# Altium PCB NodeCardWithCanThick.PcbDoc
Units mm, origin at the board's own origin, x right, y up, seen from the top; angles counter-clockwise.
Board outline 199.06 x 48.59 mm, 8 copper layers (Top Layer, Internal Plane 1, Internal Plane 2, Internal Plane 3, Internal Plane 4, Internal Plane 5, Internal Plane 6, Bottom Layer), stack 0.605 mm thick; 93 components, 51 nets, 319 pads, 49 vias.
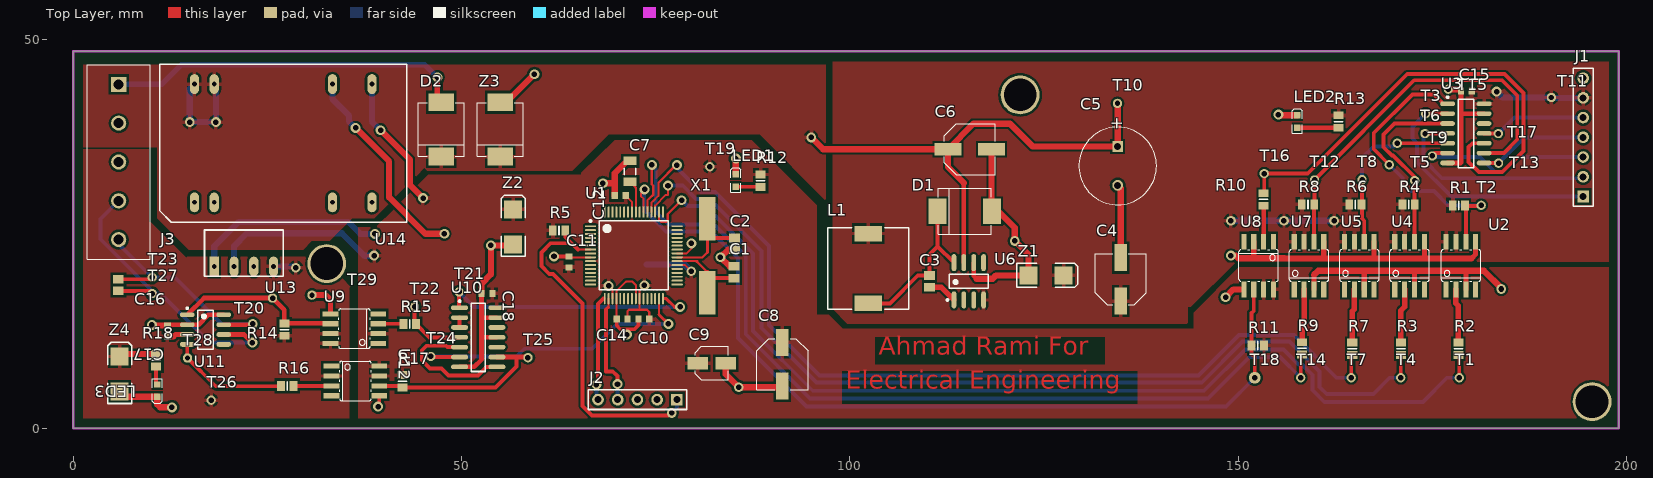
[diagram p0: Top Layer view]
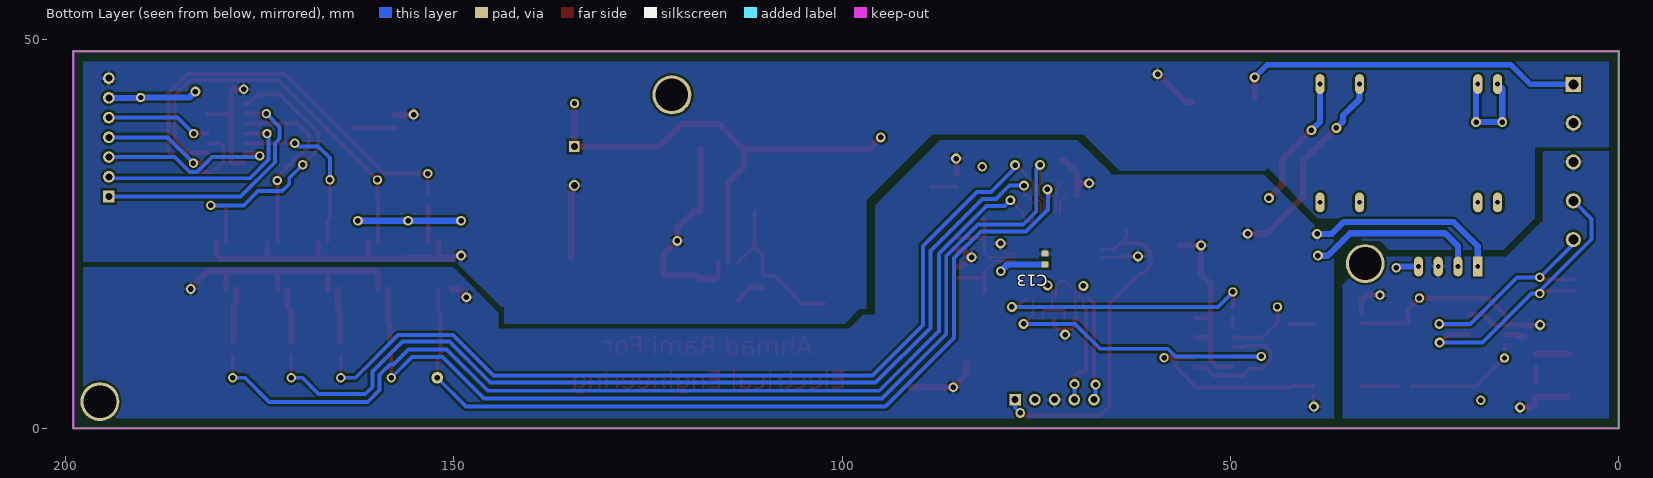
[diagram p1: Bottom Layer view, seen from below]
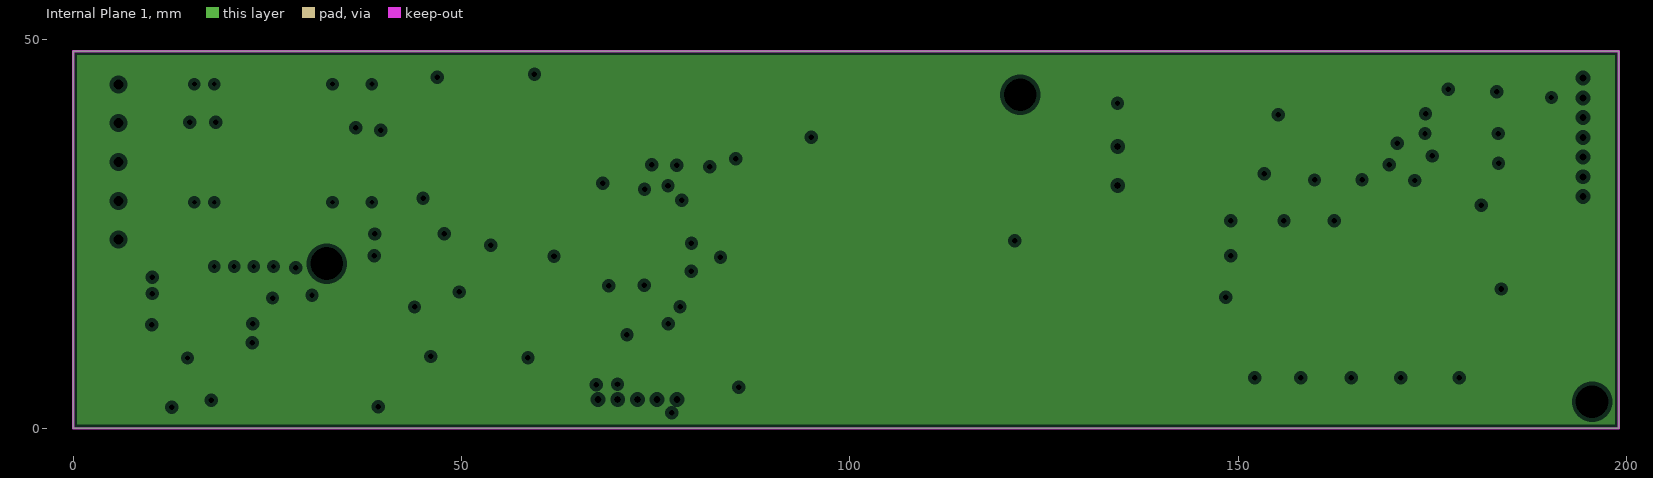
[diagram p2: Internal Plane 1, clearances drawn from the general rule]
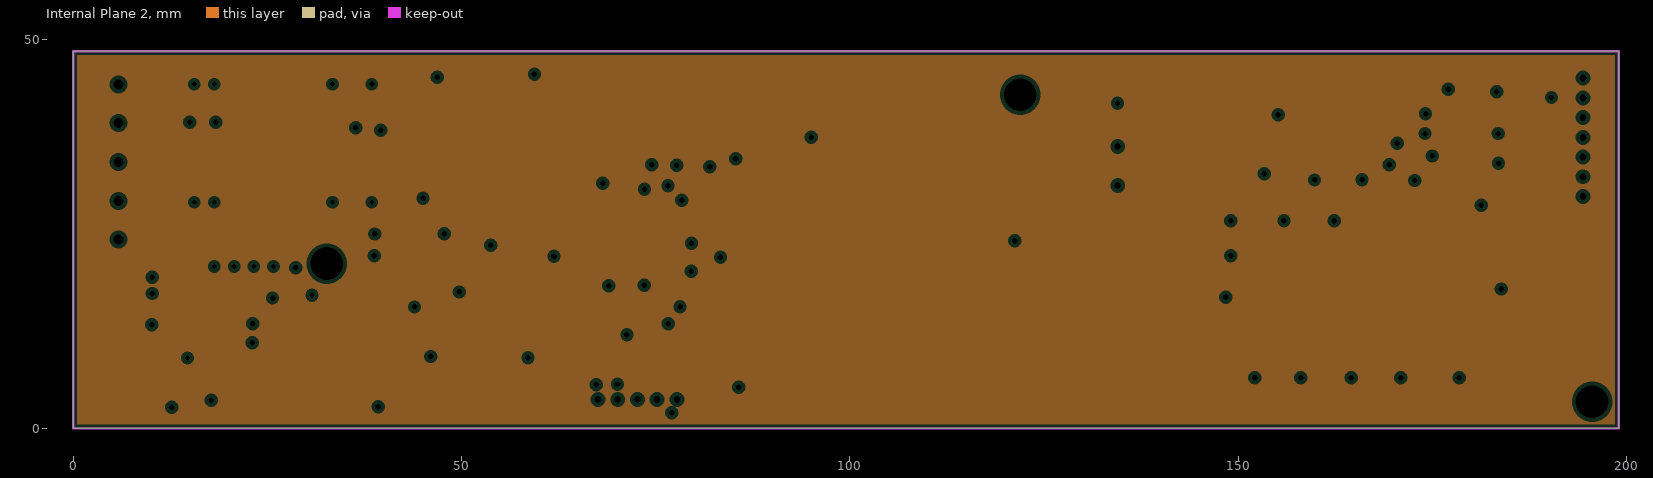
[diagram p3: Internal Plane 2, clearances drawn from the general rule]
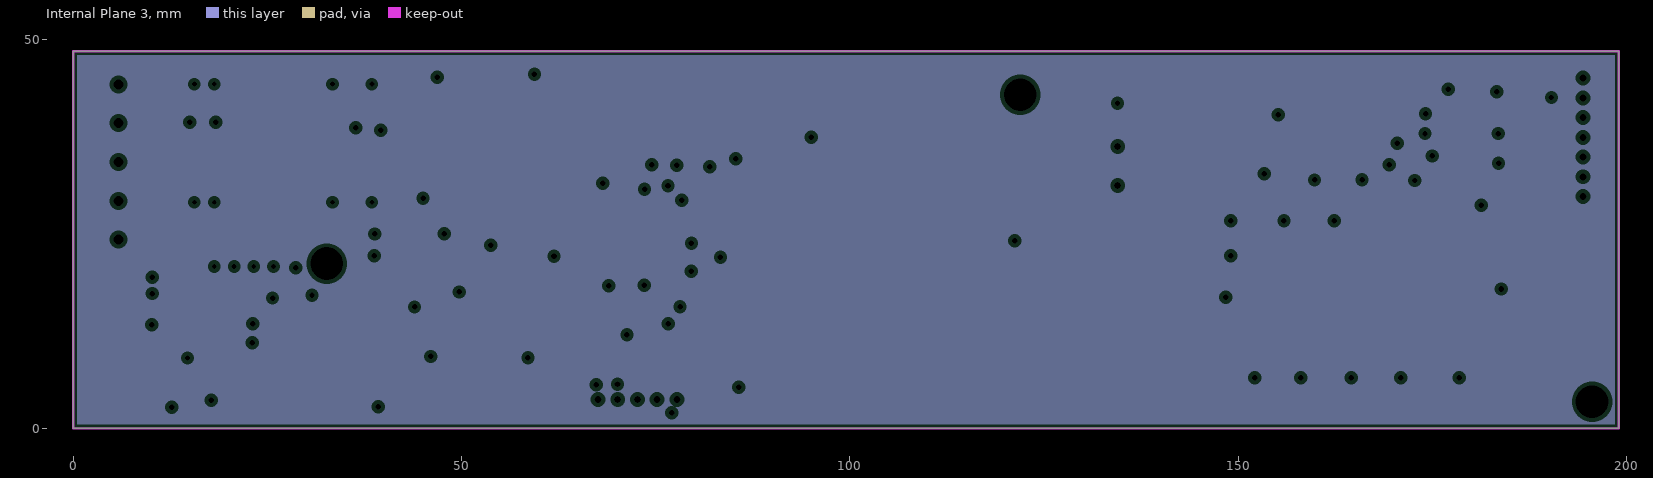
[diagram p4: Internal Plane 3, clearances drawn from the general rule]
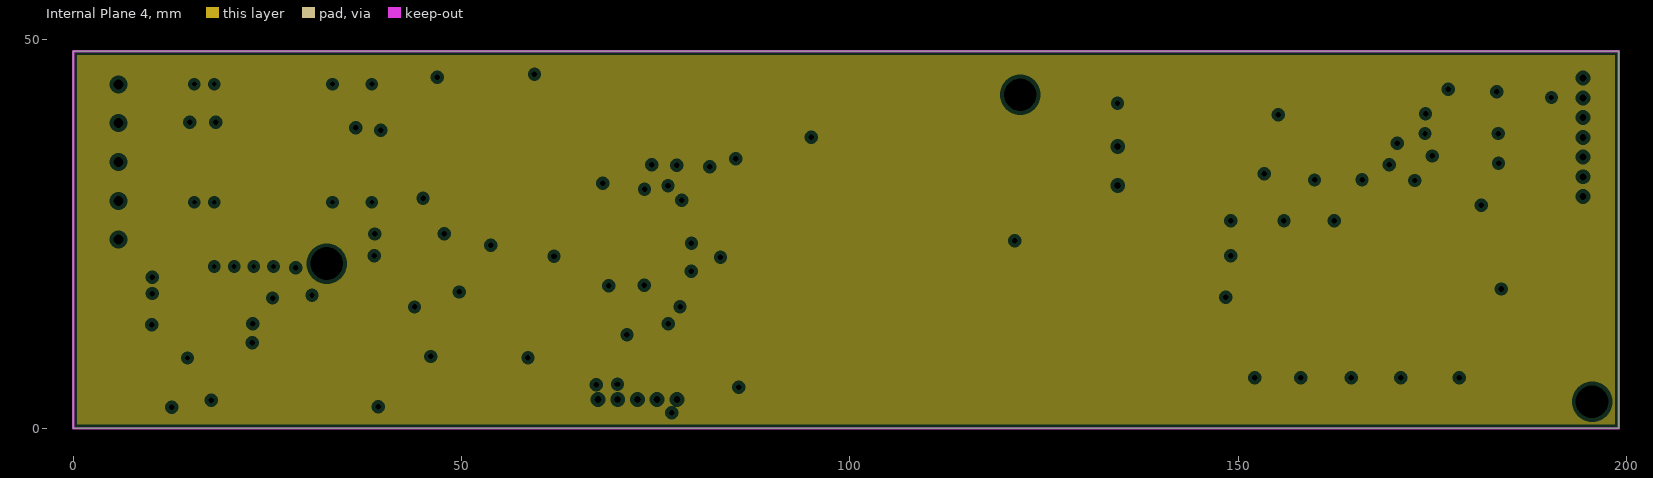
[diagram p5: Internal Plane 4, clearances drawn from the general rule]
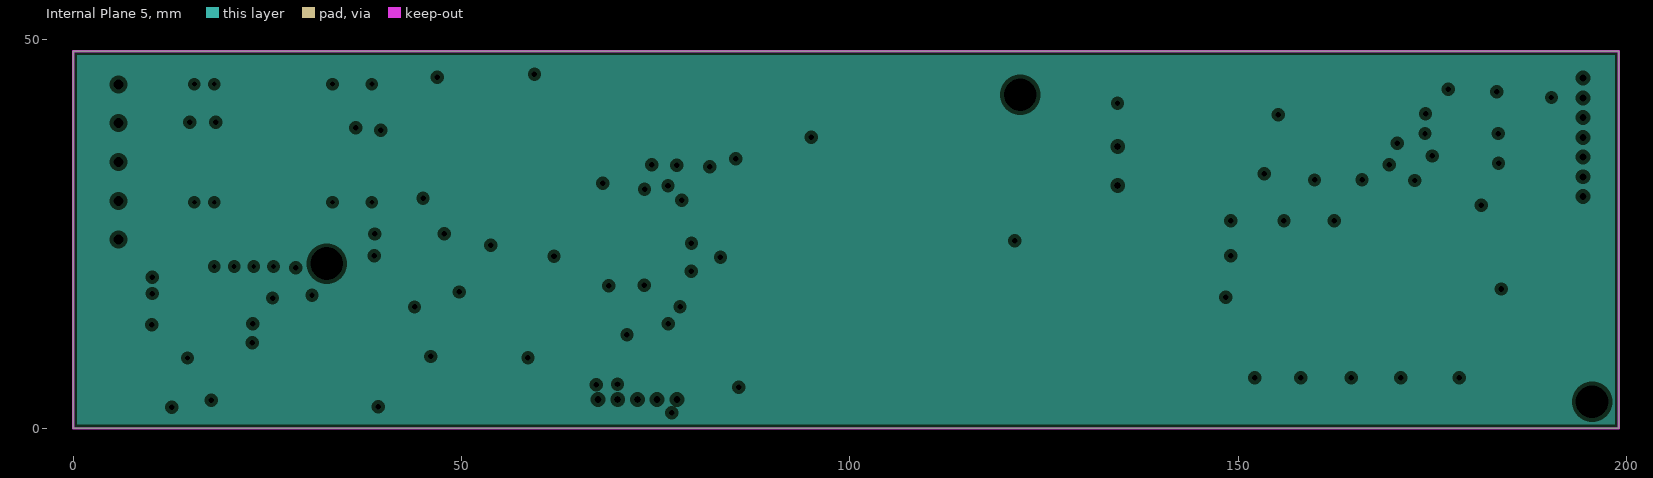
[diagram p6: Internal Plane 5, clearances drawn from the general rule]
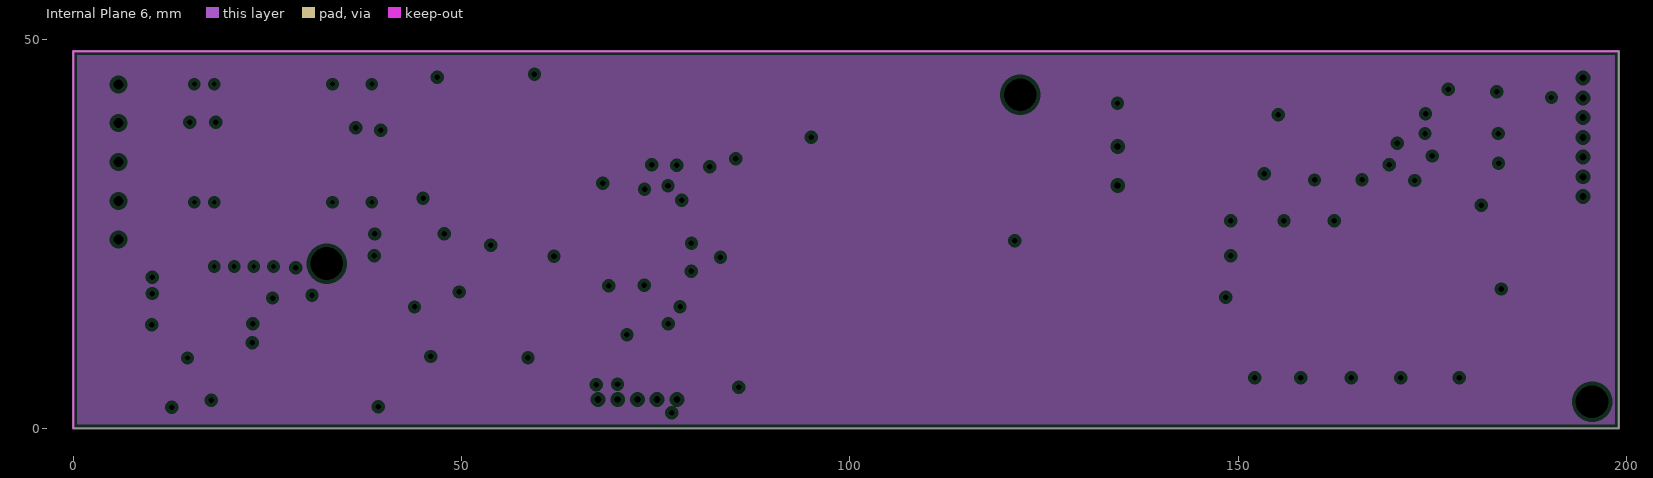
[diagram p7: Internal Plane 6, clearances drawn from the general rule]

## Layer stack, top to bottom
Top Solder: solder mask 0.0102, Solder Resist, Dk 3.5
Top Layer: signal copper 0.0356
Internal Plane 1: plane copper 0.0356
Internal Plane 2: plane copper 0.0356
Internal Plane 3: plane copper 0.0356
Internal Plane 4: plane copper 0.0356
Internal Plane 5: plane copper 0.0356
Internal Plane 6: plane copper 0.0356
Dielectric 1: dielectric 0.32, FR-4, Dk 4.8
Bottom Layer: signal copper 0.0356
Bottom Solder: solder mask 0.0102, Solder Resist, Dk 3.5

## Board outline
-0.025,-0.025 -0.025,48.565 199.034,48.565 199.034,-0.025

## Design rules (kind name [scope] priority, off if disabled: settings)
Clearance [All] p1: gap=0.3
HoleSize [All] p1: absolutevalues=TRUE maxlimit=4.5 minlimit=0.025 maxpercent=80.000 minpercent=20.000
PasteMaskExpansion [All] p1: expansion=0.5
PlaneClearance [All] p1: clearance=0.508
PlaneConnect [All] p1: planeconnectstyle=Relief reliefexpansion=0.508 reliefentries=4 reliefconductorwidth=0.5 reliefairgap=0.254
PolygonConnect [All] p1: connectstyle=Relief reliefconductorwidth=0.5 reliefentries=4 polygonreliefangle="90 Angle" airgapwidth=0.3
RoomDefinition NodeCardWithCan [InComponentClass('NodeCardWithCan')] p1: confinementstyle=ConfineIn formatcopy=TRUE lockcomponents=FALSE outline -50.8,-76.2 0,-76.2 0,-50.8 -50.8,-50.8
RoutingVias [All] p1: holewidth=0.7 width=1.1 viastyle="Through Hole" minholewidth=0.7 minwidth=1.1 maxholewidth=0.9 maxwidth=1.3
SolderMaskExpansion [All] p1: expansion=0.127
Width Power_Width [(InNet('CTRLGND') OR InNet('CTRLVCC+3.3') OR InNet('INPUTGND') OR InNet('INPUTVCC') OR InNet('MAINGND') OR InNet('MAINPOWER+24') OR InNet('OUTVCC+5'))] p1: maxlimit=1 minlimit=0.8 preferedwidth=0.8 minimp=50.000000 maximp=50.000000 favimp=50.000000
Width [All] p2: maxlimit=0.7 minlimit=0.5 preferedwidth=0.5 minimp=50.000000 maximp=50.000000 favimp=50.000000
26 further rules are at their usual default settings.

## Components (designator, comment, footprint, x,y, rotation, side; value= is the part's Value field where it differs from the comment)
C1 "Cap" C0805 85.09,20.091 r270 top
C2 "Cap" C0805 85.141,23.749 r90 top
C3 "Cap" C0805 110.236,18.923 r90 top
C4 "100uF" "WCAP-PSLP 6.3x5.8x2.2" 134.874,19.177 r90 top
C5 "220uF" "WCAP-PTG5 10x12.5x5x0.6" 134.493,33.782 r270 top
C6 "22 μF" "WCAP-PSLP 6.3x5.8x2.2" 115.443,35.941 r0 top
C7 "Cap" C1206 71.704,33.071 r270 top
C8 "100uF" "WCAP-PSLP 6.3x5.8x2.2" 91.313,8.255 r270 top
C9 "22uF" "WCAP-PSLP 4x5.5x1" 82.22,8.382 r0 top
C10 "Cap" 1608[0603] 73.47,14.05 r0 top
C11 "Cap" 1608[0603] 63.818,21.416 r270 top
C12 "Cap" 1608[0603] 70.434,29.947 r0 top
C13 "Cap" 1608[0603] 73.851,21.79 r270 bottom
C14 "Cap" 1608[0603] 70.676,14.05 r0 top
C15 "Cap" 1608[0603] 179.4,43.434 r0 top
C16 "Cap" C0805 5.791,18.44 r90 top
C17 "Cap" 1608[0603] 12.116,12.548 r270 top
C18 "Cap" 1608[0603] 53.264,17.374 r0 top
D1 "Diode" DO-214AB_Unidirectional 114.808,27.94 r0 top
D2 "Diode" DO-214AB_Unidirectional 47.371,38.481 r90 top
J1 "Header 7" HDR1X7 194.437,29.845 r90 top
J2 "Header 5" HDR1X5 77.724,3.683 r180 top
J3 "691241710005" 691241710005 5.842,34.29 r270 top
L1 "68uH" "WE-PD 1030" 102.362,20.574 r90 top
LED1 "150060GS75000" LED_0603_Green 85.319,31.902 r90 top
LED2 "150060GS75000" LED_0603_Green 157.607,39.497 r90 top
LED3 "150060GS75000" LED_0603_Green 10.795,4.851 r270 top
R1 "Res1" 6-0805_L 178.435,28.702 r180 top
R2 "Res1" 6-0805_L 178.359,10.249 r90 top
R3 "Res1" 6-0805_L 170.967,10.249 r90 top
R4 "Res1" 6-0805_L 171.958,28.829 r180 top
R5 "Res1" 6-0805_L 62.548,25.48 r180 top
R6 "Res1" 6-0805_L 165.1,28.829 r180 top
R7 "Res1" 6-0805_L 164.694,10.249 r90 top
R8 "Res1" 6-0805_L 159.004,28.829 r180 top
R9 "Res1" 6-0805_L 158.242,10.287 r90 top
R10 "Res1" 6-0805_L 153.289,29.464 r90 top
R11 "Res1" 6-0805_L 152.527,10.668 r180 top
R12 "Res1" 6-0805_L 88.519,31.877 r90 top
R13 "Res1" 6-0805_L 162.941,39.497 r90 top
R14 "Res1" 6-0805_L 27.178,12.7 r270 top
R15 "Res1" 6-0805_L 43.332,13.411 r180 top
R16 "Res1" 6-0805_L 27.559,5.461 r180 top
R17 "Res1" 6-0805_L 42.367,6.045 r270 top
R18 "Res1" 6-0805_L 10.668,8.763 r90 top
T1 "TestPoint" "Test Point"#1 1440.993,1269.771 r0 top
T2 "TestPoint" "Test Point"#1 1443.812,1291.971 r0 top
T3 "TestPoint" "Test Point"#1 1436.649,1303.782 r0 top
T4 "TestPoint" "Test Point"#1 1433.449,1269.771 r0 top
T5 "TestPoint" "Test Point"#1 1435.252,1295.171 r0 top
T6 "TestPoint" "Test Point"#1 1436.573,1301.217 r0 top
T7 "TestPoint" "Test Point"#1 1427.074,1269.771 r0 top
T8 "TestPoint" "Test Point"#1 1428.471,1295.273 r0 top
T9 "TestPoint" "Test Point"#1 1437.51,1298.334 r0 top
T10 "TestPoint" "Test Point"#1 -1128.801,1304.341 r90 top
T11 "TestPoint" "Test Point"#1 1452.855,1305.865 r0 top
T12 "TestPoint" "Test Point"#1 -1103.427,1294.486 r90 top
T13 "TestPoint" "Test Point"#1 -1079.729,1296.645 r90 top
T14 "TestPoint" "Test Point"#1 -1105.205,1269.009 r90 top
T15 "TestPoint" "Test Point"#1 -1086.206,1306.17 r90 top
T16 "TestPoint" "Test Point"#1 -1109.904,1295.298 r90 top
T17 "TestPoint" "Test Point"#1 -1079.754,1300.455 r90 top
T18 "TestPoint" "Test Point"#2 152.146,6.502 r90 top
T19 "TestPoint" "Test Point"#1 -1181.303,1296.187 r90 top
T20 "TestPoint" "Test Point"#1 -1237.615,1279.271 r90 top
T21 "TestPoint" "Test Point"#1 1312.189,1280.82 r0 top
T22 "TestPoint" "Test Point"#1 -1219.327,1278.128 r90 top
T23 "TestPoint" "Test Point"#1 -1253.109,1281.938 r90 top
T24 "TestPoint" "Test Point"#1 -1217.244,1271.753 r90 top
T25 "TestPoint" "Test Point"#1 -1204.722,1271.6 r90 top
T26 "TestPoint" "Test Point"#1 -1245.514,1266.114 r90 top
T27 "TestPoint" "Test Point"#1 -1253.109,1279.855 r90 top
T28 "TestPoint" "Test Point"#1 -1248.562,1271.549 r90 top
T29 "TestPoint" "Test Point"#1 -1232.535,1279.652 r90 top
U1 "DSPIC33EP512MC806-I/PT" MCHP-TQFP-PT64_N 72.183,22.263 r0 top
U2 "HCPL0601" SOIC08 178.689,20.955 r0 top
U3 "SN74HC14D" D014_L 179.324,37.973 r0 top
U4 "HCPL0601" SOIC08 172.085,20.955 r0 top
U5 "HCPL0601" SOIC08 165.608,20.955 r0 top
U6 "LM2675M-5.0/NOPB" M08A_N 115.316,18.923 r90 top
U7 "HCPL0601" SOIC08 159.131,20.955 r0 top
U8 "HCPL0601" SOIC08 152.654,20.955 r180 top
U9 "HCPL0601" SOIC08 36.195,12.827 r90 top
U10 "SN74HC14D" D014_N 52.146,11.709 r0 top
U11 "SN65HVD1050D" D8_L 17.018,12.7 r0 top
U12 "HCPL0601" SOIC08 36.322,6.096 r270 top
U13 "NKE0305SC" NKE0305SC 18.161,20.828 r90 top
U14 "TEN 3-2410N" "TRACO ISOLATED CONVERTER" 13.056,29.083 r90 top
X1 "ABLS2-8.000MHZ-D4Y-T" XTAL1140X470X330 81.649,22.204 r270 top
Z1 "Zener" SMB 125.273,19.685 r0 top
Z2 "Zener" SMB 56.642,25.933 r90 top
Z3 "36V zener" DO-214AB_Unidirectional 54.991,38.481 r90 top
Z4 "Zener" SMB 5.969,6.985 r90 top

## Footprints (in the part's own frame and the unit in brackets; to place one, negate y for a bottom-side part, rotate by r counter-clockwise, add the part's x,y. Pads: shape width x height; smd on the part's side, far side on the other; paste and mask are expansions set on the pad)
6-0805_L [mm] "Chip Resistor, Body 2.0x1.2mm, IPC High Density"
  rect 1x1.3 smd: 1(-0.8,0) 2(0.8,0)
  silkscreen extent 0,-0.55 0,0.55, body extent -1.07,-0.7 1.07,0.7, height 0.7
1608[0603] [mm] "Chip Capacitor, Body 1.6x0.8mm, IPC High Density"
  rect 0.8x0.9 smd: 1(-0.7,0) 2(0.7,0)
  body extent -0.87,-0.48 0.87,0.48, height 1.3
691241710005 [mm] "Serie 2417 - 5.00 mm _ 5 pins"
  rect 1.95x1.95 hole 1.3: 1(-10,0)
  round 1.95 hole 1.3: 2(-5,0) 3(0,0) 4(5,0) 5(10,0)
  silkscreen extent -12.5,-4.05 12.5,4.05, body extent -12.5,-4.05 12.5,4.05, height 10.1
C0805 [mm] "Chip Capacitor, Body 2.0x1.3mm, IPC High Density"
  rect 1.1x1.4 smd: 1(-0.75,0) 2(0.75,0)
  body extent -1.1,-0.72 1.1,0.72, height 1.4
C1206 [mm] "Chip Capacitor, Body 3.2x1.6mm, IPC High Density"
  rect 1.1x1.7 smd: 1(-1.35,0) 2(1.35,0)
  silkscreen extent -0.4,-0.75 0.4,0.75, body extent -1.7,-0.9 1.7,0.9, height 1.3
D8_L [mm] "SOIC, 8-Leads, Body 4.9x3.9mm, Pitch 1.27mm, IPC High Density"
  oval 1.9x0.6 smd: 1(-2.35,1.905) 2(-2.35,0.635) 3(-2.35,-0.635) 4(-2.35,-1.905) 5(2.35,-1.905) 6(2.35,-0.635) 7(2.35,0.635) 8(2.35,1.905)
  silkscreen extent -2.47,-2.5 1,2.88, body extent -2,-2.5 2,2.5, height 1.75
D014_L [mm] "SOIC, 14-Leads, Body 8.7x3.9mm, Pitch 1.27mm, IPC High Density"
  oval 1.9x0.6 smd: 1(-2.35,3.81) 2(-2.35,2.54) 3(-2.35,1.27) 4(-2.35,0) 5(-2.35,-1.27) 6(-2.35,-2.54) 7(-2.35,-3.81) 8(2.35,-3.81) 9(2.35,-2.54) 10(2.35,-1.27) 11(2.35,0) 12(2.35,1.27) 13(2.35,2.54) 14(2.35,3.81)
  silkscreen extent -2.47,-4.4 1,4.78, body extent -1.95,-4.33 1.95,4.33, height 1.75
D014_N [mm] "SOIC, 14-Leads, Body 8.7x3.9mm, Pitch 1.27mm, IPC Medium Density"
  oval 2.2x0.6 smd: 1(-2.4,3.81) 2(-2.4,2.54) 3(-2.4,1.27) 4(-2.4,0) 5(-2.4,-1.27) 6(-2.4,-2.54) 7(-2.4,-3.81) 8(2.4,-3.81) 9(2.4,-2.54) 10(2.4,-1.27) 11(2.4,0) 12(2.4,1.27) 13(2.4,2.54) 14(2.4,3.81)
  silkscreen extent -2.52,-4.4 0.9,4.78, body extent -1.95,-4.33 1.95,4.33, height 1.75
DO-214AB_Unidirectional [mm] "WE-TVSP Power TVS Diode, DO-214AB, Unidirectional"
  rect 2.3x3.3 smd: 1(-3.5,0) 2(3.5,0)
  silkscreen extent -3.43,-2.95 3.43,2.95, body extent -3.97,-2.95 3.97,2.95, height 2.5
HDR1X5 [mm] "Connector; Header; 5 Position"
  rect 1.5x1.5 hole 0.9: 1(0,0)
  round 1.5 hole 0.9: 2(2.54,0) 3(5.08,0) 4(7.62,0) 5(10.16,0)
  silkscreen extent -1.27,-1.27 11.43,1.27
HDR1X7 [mm] "Connector; Header; 7 Position"
  rect 1.5x1.5 hole 0.9: 1(0,0)
  round 1.5 hole 0.9: 2(2.54,0) 3(5.08,0) 4(7.62,0) 5(10.16,0) 6(12.7,0) 7(15.24,0)
  silkscreen extent -1.27,-1.27 16.51,1.27
LED_0603_Green [mm] "Chip LED, 2-Leads, Body 1.6x0.8mm, IPC Medium Density"
  rect 0.8x0.8 smd: 1(-0.8,0) 2(0.8,0)
  silkscreen extent -1.52,-0.64 1.65,0.64, body extent -0.8,-0.4 0.8,0.4, height 0.7
M08A_N [mm] "SOIC, 8-Leads, Body 4.9x3.9mm, Pitch 1.27mm, IPC Medium Density"
  oval 2.2x0.6 smd: 1(-2.4,1.905) 2(-2.4,0.635) 3(-2.4,-0.635) 4(-2.4,-1.905) 5(2.4,-1.905) 6(2.4,-0.635) 7(2.4,0.635) 8(2.4,1.905)
  silkscreen extent -2.52,-2.5 0.9,2.88, body extent -2,-2.5 2,2.5, height 1.75
MCHP-TQFP-PT64_N [mm] "TQFP, 64-Leads, Body 10x10mm, Pitch 0.5mm, IPC Medium Density"
  oval 1.45x0.25 smd: 1(-5.575,3.75) 2(-5.575,3.25) 3(-5.575,2.75) 4(-5.575,2.25) 5(-5.575,1.75) 6(-5.575,1.25) 7(-5.575,0.75) 8(-5.575,0.25) 9(-5.575,-0.25) 10(-5.575,-0.75) 11(-5.575,-1.25) 12(-5.575,-1.75) 13(-5.575,-2.25) 14(-5.575,-2.75) 15(-5.575,-3.25) 16(-5.575,-3.75) 33(5.575,-3.75) 34(5.575,-3.25) 35(5.575,-2.75) 36(5.575,-2.25) 37(5.575,-1.75) 38(5.575,-1.25) 39(5.575,-0.75) 40(5.575,-0.25) 41(5.575,0.25) 42(5.575,0.75) 43(5.575,1.25) 44(5.575,1.75) 45(5.575,2.25) 46(5.575,2.75) 47(5.575,3.25) 48(5.575,3.75)
  oval 0.25x1.45 smd: 17(-3.75,-5.575) 18(-3.25,-5.575) 19(-2.75,-5.575) 20(-2.25,-5.575) 21(-1.75,-5.575) 22(-1.25,-5.575) 23(-0.75,-5.575) 24(-0.25,-5.575) 25(0.25,-5.575) 26(0.75,-5.575) 27(1.25,-5.575) 28(1.75,-5.575) 29(2.25,-5.575) 30(2.75,-5.575) 31(3.25,-5.575) 32(3.75,-5.575) 49(3.75,5.575) 50(3.25,5.575) 51(2.75,5.575) 52(2.25,5.575) 53(1.75,5.575) 54(1.25,5.575) 55(0.75,5.575) 56(0.25,5.575) 57(-0.25,5.575) 58(-0.75,5.575) 59(-1.25,5.575) 60(-1.75,5.575) 61(-2.25,5.575) 62(-2.75,5.575) 63(-3.25,5.575) 64(-3.75,5.575)
  silkscreen extent -5.7,-4.45 4.45,4.55, body extent -5,-5 5,5, height 1.2
NKE0305SC [mm]
  rect 2.54x1.2 hole 0.6: 1(0,0)
  oval 2.54x1.2 hole 0.6: 2(0,-2.54) 3(0,-5.08) 4(0,-7.62)
  silkscreen extent -1.27,-8.89 4.7,1.27
SMB [mm] "DO-214-AA/SMB; 2 C-Bend Leads; Body 5.3 x 3.6 mm, inc. leads (LxW)"
  rect 2.3x2.3 smd: 1(-2.25,0) 2(2.25,0)
  silkscreen extent -3.8,-1.55 4.1,1.55
SOIC08 [mil]
  rect 26x80 smd paste-1000 mask-1000: 1(-75,-121) 2(-25,-121) 3(25,-121) 4(75,-121) 5(75,121) 6(25,121) 7(-25,121) 8(-75,121)
  silkscreen extent -100,-80 100,80
"Test Point"#1 [mm] "Test Point"
  round 1.2 hole 0.7: 1(-1262.507,-1263.269)
"Test Point"#2 [mm] "Test Point"
  round 1.5 hole 0.7: 1(0,0)
"TRACO ISOLATED CONVERTER" [mm]
  oval 2.54x1.2 hole 0.6: 2(0,-2.54) 3(0,-5.08) 9(0,-20.32) 11(0,-25.4) 14(15.24,-25.4) 16(15.24,-20.32) 22(15.24,-5.08) 23(15.24,-2.54)
  silkscreen extent -2.54,-29.9 17.78,1.95
"WCAP-PSLP 4x5.5x1" [mm] "Polarized capacitors, Aluminum Polymer Capacitors, 2-Leads, Body 4x5.5x1"
  rect 2.6x1.6 smd: 1(-1.8,0) 2(1.8,0)
  silkscreen extent -2.15,-2.15 2.15,2.15, body extent -2.5,-2.15 2.5,2.15, height 5.45
"WCAP-PSLP 6.3x5.8x2.2" [mm] "Polarized capacitors, Aluminum Polymer Capacitors, 2-Leads, Body 6.3x5.8x2.2"
  rect 3.5x1.6 smd: 1(-2.8,0) 2(2.8,0)
  silkscreen extent -3.3,-3.3 3.3,3.3, body extent -3.65,-3.3 3.65,3.3, height 5.75
"WCAP-PTG5 10x12.5x5x0.6" [mm] "Polarized capacitors, Aluminum Polymer Capacitors, 2-Leads, Body 10x12.5x5x0.6"
  rect 1.4x1.4 hole 0.9: 1(-2.5,0)
  round 1.4 hole 0.9: 2(2.5,0)
  silkscreen extent -5,-5 5,5, body extent -4.96,-4.97 4.99,5, height 12.71
"WE-PD 1030" [mm] "SMD Inductor, 2-Leads, Body 10,0x10,0mm"
  rect 2x3.5 smd: 1(-4.5,0) 2(4.5,0)
  silkscreen extent -5.25,-5.2 5.25,5.2, body extent -5,-5 5,5, height 2.7
XTAL1140X470X330 [mm]
  rect 5.6x2.1 smd paste-25.4 mask-25.4: 1(-4.752,-0.001) 2(4.748,-0.001)

## Part data
C1 C2 C3 C7 C10 C11 C12 C13 C14 C15 C16 C17 C18: "Capacitor"
C4: library part "WCAP-PSLP 6.3x5.8x2.2 875105544003", "WCAP-PSLP Aluminum Polymer Capacitors , 22 µF; + / - 20%; 16 V , 6,3 x 5,8"
C5: library part "WCAP-PTG5 10x12.5x5x0.6 870025175010", "WCAP-PTG5 Aluminum Polymer Capacitors , 1000 µF; + / - 20%; 6,3 V , 10 x 12,5"
C6: library part "WCAP-PSLP 6.3x5.8x2.2 875105544003", "WCAP-PSLP Aluminum Polymer Capacitors , 22 µF; + / - 20%; 50 V , 6,3 x 5,8"
C8: library part "WCAP-PSLP 6.3x5.8x2.2 875105544003", "WCAP-PSLP Aluminum Polymer Capacitors , 22 µF; + / - 20%; 16V , 6,3 x 5,8"
C9: library part "WCAP-PSLP 4x5.5x1 875105240001", "WCAP-PSLP Aluminum Polymer Capacitors , 10 µF; + / - 20%; 10 V , 4 x 5,5"
D1 D2: "Default Diode"
J1: "Header, 7-Pin"
J2: "Header, 5-Pin"
J3: "WR-TBL Horizontal Cable Entry With Rising Cage Clamp,Serie 2417 - 5.00 mm"
L1: library part "WE-PD 1030, 7447713015", "SMD-Shielded Power Inductor WE-PD, L=1.50 µH"
LED1 LED2 LED3: library part "WL-SMCW 0603  150060GS75000", "SMD mono-color Chip LED, WL-SMCW, Green"
R1 R2 R3 R4 R5 R6 R7 R8 R9 R10 R11 R12 R13 R14 R15 R16 R17 R18: "Resistor"
T1 T2 T3 T4 T5 T6 T7 T8 T9 T10 T11 T12 T13 T14 T15 T16 T17 T18 T19 T20 T21 T22 T23 T24 T25 T26 T27 T28 T29: library part "Test Point", "Test Point"
U1: "16-Bit Microcontroller and Digital Signal Controller with High-Speed PWM, USB and Advanced Analog, 70 MIPS, 53 I/O, EPMP, -40 to 85 degC, 64-pin TQFP (PT64), Tray"
U3 U10: "Hex Schmitt-Trigger Inverter"
U6: "SIMPLE SWITCHER® Power Converter High Efficiency 1A Step-Down Voltage Regulator, 8-pin Narrow SOIC, Pb-Free"
U11: "High-Speed EMC Optimized CAN Transceiver, 70 mA, 5 V, -40 to 125 degC, 8-pin SOIC (D), Green (RoHS & no Sb/Br)"
U13: "muRata 3.3 to 5.0 isolated converter"
U14: "Traco 24/3.3 isolated converter"
Z1 Z2 Z3 Z4: library part "WE-TVSP DO-214AB, 824540102", "WE-TVSP Power TVS Diode, Unidirectional, 1500 W, 100 VDC"

## Free pads (board coordinates)
  round 5 hole 4.2: 0(32.639,21.209) 0(121.92,42.926) 0(195.58,3.429)

## Via types
v1: diameter 1.27, hole 0.711, Top Layer to Bottom Layer, 49 vias

## Nets (pads, with @x,y where several pads share a name; then routed paths per layer and width w, separated by ;. In a path a pad name is that pad's centre, name@x,y a point inside that pad or via, vN(x,y) a via of type N, cw(c..) or ccw(c..) an arc to the next point about the centre after c; other vN are vias at no path point)
CANH: C16.2 J3.5 T23.1 U11.7 | length 29.5
  Top Layer w0.5: C16.2 T23.1@9.919,19.19
  Top Layer w0.6: U11.7 23.012,13.335 v1(23.114,13.437)
  Bottom Layer w0.5: J3.5@5.842,23.749 T23.1 13.081,19.431 19.075,13.437 v1(23.114,13.437)
CANL: C16.1 J3.4 T27.1 U11.6 | length 39.3
  Top Layer w0.5: C16.1 T27.1@9.818,17.69
  Top Layer w0.6: U11.6 22.022,12.065 v1(23.063,11.024)
  Bottom Layer w0.5: J3.4 3.505,26.953 3.505,24.333 10.16,17.678 T27.1 11.227,17.348 17.551,11.024 v1(23.063,11.024)
CANRX: T24.1 U1.31 U10.6 | length 39.8
  Top Layer w0.254: 75.433,14.636 U1.31
  Top Layer w0.4: 75.433,14.636 v1(76.632,13.437)
  Top Layer w0.5: T24.1 46.101,9.169 U10.6
  Bottom Layer w0.5: T24.1 57.073,9.246 58.071,10.243 66.809,10.243 70.002,13.437 v1(76.632,13.437)
CANTX: T21.1 U1.32 U10.1 | length 33.6
  Top Layer w0.4: 76.149,16.688 76.378,16.688 77.445,15.621
  Top Layer w0.5: U10.1@49.682,15.583 T21.1 ; 77.445,15.621 v1(78.13,15.621)
  Bottom Layer w0.5: T21.1 51.613,15.621 v1(78.13,15.621)
CLOCK: R2.1 T1.1 U1.50 | length 132
  Top Layer w0.254: U1.50 75.433,26.868 75.692,26.609
  Top Layer w0.3: 75.692,26.609 76.342,26.609 76.562,26.829 76.562,27.591 v1(78.334,29.362)
  Top Layer w0.5: T1.1 R2.1@178.486,9.322
  Bottom Layer w0.5: v1(78.334,29.362) 79.096,28.6 81.407,28.6 87.528,22.479 87.528,12.522 95.225,4.826 145.618,4.826 150.952,10.16 155.829,10.16 157.785,8.204 158.242,8.204 159.563,6.883 159.563,4.928 161.087,3.404 173.787,3.404 176.886,6.502 T1.1
CTRLGND: C1.1 C2.1 C7.1 C8.2 C9.2 C10.1 C11.1 C12.1 C13.1 C14.1 C18.1 J2.3 LED1.2 U1.9 U1.20 U1.25 U1.41 U2.3 U4.3 U5.3 U7.3 U8.5 U10.7 U10.11 U10.13 U12.5 U13.1 U14.16 Z2.1 | length 158.8
  Top Layer w0.254: C11.1@63.921,22.013 U1.9 ; C14.1@69.933,14.093 U1.20 69.933,17.628 71.145,18.84 ; 71.145,18.872 72.009,18.872 72.433,18.448 72.433,17.955 U1.25 ; U1.41 78.977,22.513 79.604,23.139
  Top Layer w0.3: C11.1 C11.1@63.921,22.013 ; 79.604,23.139 v1(79.604,23.8)
  Top Layer w0.5: v1@39.395,2.946 U12.5 ; v1(61.9,22.123) C11.1@63.811,22.123 ; C14.1 69.976,13.209 70.434,12.751 72.263,12.751 72.77,13.258 C10.1
  Top Layer w0.6: U10.7 51.638,7.899 52.564,8.825 52.564,11.709 ; C18.1 52.564,14.249 ; U10.11 52.564,11.709 ; U10.13 52.564,14.249 ; 52.564,11.709 52.564,14.249
  Top Layer w0.66: U7.3 159.766,19.736 ; U5.3 166.243,20.295 ; U4.3 172.72,20.269 ; U2.3 179.324,20.269
  Top Layer w0.8: v1(36.347,38.684) 40.665,34.366 40.665,29.718 45.339,25.044 v1(47.777,25.044) ; C18.1 52.564,18.629 53.772,19.837 v1(53.772,23.546) Z2.1@56.504,23.546 ; v1(68.199,31.547) 69.658,31.547 ; C12.1 69.734,32.828 71.327,34.421 C7.1 ; C14.1@69.933,14.093 C14.1 ; C9.2 84.02,6.963 v1(85.7,5.283) 91.141,5.283 C8.2 ; C1.1 84.518,20.841 v1(83.337,22.022) 84.315,22.999 C2.1 ; LED1.2@85.319,32.779 v1(85.319,34.722) ; v1(148.387,16.866) 149.403,17.882 150.292,17.882 ; 159.766,19.736 160.325,20.295 166.243,20.295 181.661,20.295 183.896,18.059 v1(183.896,17.932)
  Bottom Layer w0.8: U13.1 18.161,23.444 21.285,26.568 35.408,26.568 36.957,25.019 v1(38.837,25.019) ; U14.16 33.376,42.393 35.484,40.284 35.484,39.548 v1(36.347,38.684)
  other v1: 39.243,2.794 71.298,12.065
CTRLVCC+3.3: C8.1 C9.1 C10.2 C11.2 C12.2 C13.2 C14.2 C18.2 R5.2 R11.1 R12.2 R17.1 T19.1 U1.10 U1.19 U1.26 U1.38 U1.57 U8.7 U8.8 U9.2 U10.14 U12.7 U12.8 U13.2 U14.14 Z2.2 | length 60.8
  Top Layer w0.254: v1(68.936,18.339) 69.433,17.842 U1.19 ; C12.2 71.933,29.148 U1.57 ; 72.933,15.326 U1.26 72.933,17.789 v1(73.533,18.39) ; U1.38 78.784,21.013 v1(79.578,20.218)
  Top Layer w0.3: C14.2 71.376,15.061 71.577,15.263 72.87,15.263 72.933,15.326 72.996,15.263 73.866,15.263 74.17,14.959 C10.2
  Top Layer w0.8: v1(39.573,38.379) 43.332,34.62 43.332,31.344 v1(45.034,29.642)
  Bottom Layer w0.8: U13.2 20.701,23.47 22.352,25.121 34.595,25.121 37.49,22.225 v1(38.735,22.225) ; U14.14 38.456,39.497 v1(39.573,38.379) ; C13.2 78.707,21.089 v1(79.578,20.218)
DATA_IN: R11.2 T18.1 U1.54 U8.6 | length 114.3
  Top Layer w0.254: U1.54 73.433,29.542 73.076,29.899 73.076,30.277 v1(73.558,30.759)
  Top Layer w0.5: U8.6 152.019,15.113 151.727,14.821 R11.2 151.727,9.563 152.146,9.144 T18.1
  Bottom Layer w0.5: v1@73.482,30.759 73.482,28.169 76.302,25.349 82.144,25.349 85.573,21.92 85.573,11.633 94.412,2.794 148.438,2.794 T18.1
DATA_OUT: R9.1 T14.1 U1.53 | length 117.7
  Top Layer w0.254: U1.53 73.933,29.362 74.123,29.553
  Top Layer w0.3: 74.13,29.553 74.697,30.12 74.697,31.231 74.498,31.43 v1(74.498,33.909)
  Top Layer w0.5: T14.1 R9.1@158.064,9.309
  Bottom Layer w0.5: v1(74.498,33.909) 75.006,33.401 75.006,27.915 76.683,26.238 82.525,26.238 86.589,22.174 86.589,12.116 94.869,3.835 146.101,3.835 151.46,9.195 155.372,9.195 T14.1
INPUTGND: C17.1 J3.3 LED3.2 T29.1 U9.5 U11.2 U11.8 U13.3 Z4.1 | length 21.2
  Top Layer w0.6: C17.1@12.203,13.335 U11.2 16.129,13.335 17.399,14.605 U11.8 ; U9.5 33.122,16.51
  Top Layer w0.8: Z4.1@6.653,4.051 LED3.2 10.795,3.073 11.176,2.692 v1(12.7,2.692) ; v1@10.171,13.248 C17.1 ; T29.1 32.487,17.145 33.122,16.51
  other v1: 10.109,13.31
INPUTVCC: C17.2 R14.2 R18.2 T26.1 U9.7 U9.8 U11.3 U12.2 U13.4 Z4.2 | length 9.7
  Top Layer w0.6: 12.914,11.848 13.132,12.065 U11.3
  Top Layer w0.8: Z4.2@6.297,9.563 R18.2 ; C17.2 12.914,11.848
  Bottom Layer w0.8: U13.4 v1@28.499,20.828
  other v1: 28.651,20.676
MAINGND: C4.2 C5.2 C6.2 C15.1 D1.2 J1.7 J3.2 LED2.2 T15.1 U2.5 U3.7 U3.13 U4.5 U5.5 U6.6 U7.5 U8.3 Z1.1 Z3.2 | length 102.7
  Top Layer w0.6: U6.6 115.951,19.609 116.307,19.253 ; U3.7 178.661,34.163 ; 178.7,34.203 178.7,40.513 ; C15.1 178.7,40.513 ; U3.13 178.7,40.513
  Top Layer w0.66: 152.019,21.971 U8.3 ; 161.036,21.895 U7.5 ; 167.513,21.895 U5.5 ; 173.99,21.869 U4.5 ; 180.061,21.869 180.594,22.403 U2.5
  Top Layer w0.8: Z3.2 55.773,41.981 v1(59.385,45.593) ; 116.307,19.253 118.389,19.253 118.821,19.685 Z1.1 123.023,22.341 v1(121.234,24.13) 121.234,25.832 119.126,27.94 D1.2 ; D1.2@118.243,28.005 C6.2 ; C5.2 134.874,30.901 C4.2 ; v1(149.073,22.225) 149.708,22.225 150.038,21.895 155.956,21.895 155.981,21.869 173.99,21.869 180.061,21.869 ; v1@155.283,40.297 LED2.2 ; T15.1 C15.1@178.472,43.663
  other v1: 155.194,40.386
MAINPOWER+24: C5.1 C6.1 D2.1 T10.1 U6.7 U14.22 U14.23 Z3.1 | length 77.2
  Top Layer w0.6: U6.7 114.681,31.598
  Top Layer w0.8: v1(95.021,37.465) 96.545,35.941 C6.1 ; 114.681,31.598 112.643,33.636 C6.1 ; T10.1@134.493,41.808 C5.1 123.56,36.282 120.625,39.218 115.92,39.218 C6.1
  Bottom Layer w0.8: U14.23 14.986,43.713 v1(14.986,39.421) v1(18.364,39.421) 18.364,44.094 U14.22
NetC1_2: C1.2 U1.39 X1.2 | length 10.6
  Top Layer w0.254: U1.39 80.367,21.513
  Top Layer w0.3: 80.303,21.449 X1.2@81.647,20.105
  Top Layer w0.5: X1.2 X1.2@81.647,19.226 ; X1.2@81.647,20.105 X1.2@81.647,19.226 ; C1.2 81.762,19.341 X1.2@81.647,19.226
NetC2_2: C2.2 U1.40 X1.1 | length 12
  Top Layer w0.254: U1.40 79.849,22.013 81.017,22.013
  Top Layer w0.3: 81.017,22.013 81.647,22.643
  Top Layer w0.4: 81.647,22.643 X1.1@81.647,24.563
  Top Layer w0.5: X1.1 81.647,24.563 81.711,24.499 C2.2
NetC3_1: C3.1 U6.1 | length 3.9
  Top Layer w0.7: C3.1 111.761,18.173 U6.1
NetC3_2: C3.2 D1.1 L1.1 U6.8 | length 21
  Top Layer w0.5: L1.1 105.152,16.074 108.751,19.673 C3.2 110.236,22.354 111.308,23.426 ; D1.1 111.308,23.426 ; U6.8 111.308,23.426
NetC7_2: C7.2 U1.56 | length 4.2
  Top Layer w0.254: U1.56 72.433,30.992
  Top Layer w0.3: C7.2 72.433,30.992
NetD2_2: D2.2 J3.1 | length 45.5
  Top Layer w0.7: D2.2@46.888,42.464 v1(46.888,45.187)
  Bottom Layer w0.7: J3.1 11.372,44.29 13.868,46.787 45.288,46.787 v1(46.888,45.187)
NetJ1_1: J1.1 T3.1 U3.2 | length 33.3
  Top Layer w0.5: T3.1 U3.2
  Bottom Layer w0.5: T3.1 172.441,38.811 172.441,37.313 173.053,36.7 173.053,34.257 177.458,29.852 194.437,29.852 J1.1
NetJ1_2: J1.2 T6.1 U3.4 | length 27.8
  Top Layer w0.5: T6.1@174.092,37.973 U3.4
  Bottom Layer w0.5: T6.1@173.853,37.734 173.853,34.589 176.254,32.188 194.437,32.188 J1.2
NetJ1_3: J1.3 T9.1 U3.6 | length 22.5
  Top Layer w0.5: T9.1@175.371,35.433 U3.6
  Bottom Layer w0.5: T9.1@175.143,34.925 181.127,34.925 183.064,32.988 184.017,32.988 185.954,34.925 J1.3
NetJ1_4: J1.4 T13.1 U3.8 | length 14.1
  Top Layer w0.5: U3.8 T13.1@183.515,34.163
  Bottom Layer w0.5: T13.1 186.868,37.465 J1.4
NetJ1_5: J1.5 T17.1 U3.11 | length 13.6
  Top Layer w0.5: U3.11 T17.1@183.49,37.973
  Bottom Layer w0.5: T17.1 185.572,40.005 J1.5
NetLED1_1: LED1.1 R12.1 | length 3.2
  Top Layer w0.5: LED1.1 R12.1@88.494,31.102
NetLED2_1: LED2.1 R13.1 | length 5.3
  Top Layer w0.6: LED2.1 R13.1
NetLED3_1: LED3.1 R18.1 | length 2.2
  Top Layer w0.5: LED3.1@10.668,5.778 R18.1
NetR1_1: R1.1 T2.1 U2.6 U3.1 | length 37.9
  Top Layer w0.5: v1(169.469,33.934) 167.462,35.941 167.462,37.998 172.441,42.977 175.235,42.977 176.428,41.783 U3.1 ; U2.6 179.324,28.613 T2.1@181.216,28.613
  Bottom Layer w0.5: v1(169.469,33.934) 171.196,32.207 171.196,31.471 172.136,30.531 175.235,30.531 177.063,28.702 T2.1
NetR2_2: R2.2 U2.2 | length 7
  Top Layer w0.7: U2.2 178.054,16.078 178.359,15.773 R2.2
NetR3_2: R3.2 U4.2 | length 7
  Top Layer w0.7: R3.2 170.967,15.164 171.45,15.646 U4.2
NetR4_1: R4.1 T5.1 U3.3 U4.6 | length 24.4
  Top Layer w0.5: U4.6 T5.1@172.72,31.877 ; T5.1 172.745,32.334 169.96,35.119 169.806,35.119 168.732,36.193 168.732,37.846 170.129,39.243 U3.3
NetR6_1: R6.1 T8.1 U3.5 U5.6 | length 22.7
  Top Layer w0.5: T8.1 165.964,27 166.243,26.721 U5.6 ; v1(170.5,36.703) U3.5
  Bottom Layer w0.5: T8.1 165.964,34.798 167.462,36.297 170.093,36.297 v1(170.5,36.703)
NetR7_2: R7.2 U5.2 | length 6.9
  Top Layer w0.7: R7.2 164.694,15.062 164.973,15.342 U5.2
NetR8_1: R8.1 T12.1 U3.9 U7.6 | length 50.8
  Top Layer w0.5: U7.6 R8.1@159.766,28.791 ; R8.1@159.842,28.867 T12.1 172.676,44.813 183.991,44.813 185.953,42.85 185.953,37.16 184.226,35.433 U3.9
NetR9_2: R9.2 U7.2 | length 6.9
  Top Layer w0.7: R9.2 158.242,13.589 158.496,13.843 U7.2
NetR10_1: R10.1 U8.2 | length 4.6
  Top Layer w0.6: U8.2 R10.1
NetR10_2: R10.2 T16.1 U3.10 | length 62.5
  Top Layer w0.5: R10.2@153.365,30.34 T16.1 158.963,32.791 171.784,45.613 184.322,45.613 186.753,43.181 186.753,35.724 184.017,32.988 180.997,32.988 179.68,34.305 179.68,36.195 180.188,36.703 U3.10
NetR14_1: R14.1 T20.1 U9.6 U11.1 | length 21.7
  Top Layer w0.6: U11.1 16.827,16.764 T20.1 27.178,15.24 R14.1 U9.6@33.084,13.5
NetR15_1: R15.1 T22.1 U10.4 | length 8.3
  Top Layer w0.5: R15.1@43.942,13.602 T22.1 ; R15.1 45.834,11.709 U10.4
NetR15_2: R15.2 U9.3 | length 3.2
  Top Layer w0.5: U9.3 R15.2@42.482,13.462
NetR16_1: R16.1 U12.3 | length 4.9
  Top Layer w0.5: R16.1 U12.3
NetR16_2: R16.2 T28.1 U11.4 | length 15.2
  Top Layer w0.5: T28.1@14.668,9.081 U11.4 ; T28.1 18.339,5.41 R16.2@26.708,5.41
NetR17_2: R17.2 T25.1 U10.9 U12.6 | length 24
  Top Layer w0.5: U12.6 42.151,5.461 R17.2 54.343,5.245 57.074,7.976 57.074,9.169
  Top Layer w0.6: U10.9 57.074,9.169 T25.1@58.471,9.169
NetU10_2: U10.2 U10.3 | length 1.3
  Top Layer w0.5: U10.3 U10.2
NetU10_5: U10.5 U10.8 | length 17.4
  Top Layer w0.5: U10.5 48.158,10.439 47.981,10.617 45.491,10.617 44.875,10.001 44.875,8.769 45.948,7.696 47.422,7.696 48.311,6.807 52.089,6.807 53.181,7.899 U10.8
OUT_ENABLE: R7.1 T7.1 U1.52 | length 118.5
  Top Layer w0.254: U1.52 74.433,29.018 74.587,29.172 75.355,29.94
  Top Layer w0.3: 75.355,29.94 75.355,31.627 v1@77.612,33.884
  Top Layer w0.5: T7.1 R7.1@164.567,9.322
  Bottom Layer w0.5: v1@77.724,33.528 80.823,30.429 82.626,30.429 89.586,23.47 89.586,13.284 96.088,6.782 144.907,6.782 150.114,11.989 157.201,11.989 162.687,6.502 T7.1
  other v1: 77.724,33.884
OUTVCC+5: C4.1 C15.2 J1.6 L1.2 R1.2 R4.2 R6.2 R8.2 R13.2 T11.1 U2.7 U2.8 U3.14 U4.7 U4.8 U5.7 U5.8 U6.4 U7.7 U7.8 Z1.2 | length 24.7
  Bottom Layer w0.8: v1(149.073,26.721) v1(162.357,26.721) ; v1(183.286,43.358) 184.048,42.596 T11.1 ; T11.1@190.398,42.545 J1.6
  other v1: 155.905,26.721
PGC: J2.5 U1.17 | length 13.1
  Top Layer w0.5: v1@67.564,5.613 67.564,15.994 68.258,16.688
  Bottom Layer w0.5: J2.5@67.361,3.886 v1(67.361,5.613)
PGD: J2.4 U1.18 | length 14.2
  Top Layer w0.254: 68.933,15.633 U1.18
  Top Layer w0.4: 68.605,15.306 68.933,15.633
  Top Layer w0.5: 68.605,15.306 68.605,7.315 69.469,7.315 70.079,6.706 v1(70.079,5.69)
  Bottom Layer w0.5: J2.4@70.079,3.708 v1(70.079,5.69)
STROBE: R3.1 T4.1 U1.51 | length 124.8
  Top Layer w0.254: U1.51 74.933,28.677 76.304,30.047
  Top Layer w0.3: 76.304,30.047 76.581,30.047 v1(76.581,31.242)
  Top Layer w0.5: T4.1 R3.1@170.942,9.424
  Bottom Layer w0.5: v1(76.581,31.242) 78.486,31.242 80.188,29.54 81.915,29.54 88.646,22.809 88.646,12.929 95.682,5.893 145.313,5.893 150.571,11.151 156.642,11.151 160.503,7.29 160.503,5.334 161.417,4.42 167.411,4.42 169.494,6.502 T4.1
VPP: J2.1 R5.1 U1.7 | length 44.9
  Top Layer w0.254: 64.973,23.013 U1.7
  Top Layer w0.5: R5.1 63.348,24.638 64.16,23.825 ; 64.973,23.013 64.16,23.825 ; v1@76.581,1.626 66.802,1.626 65.583,2.845 65.583,16.078 61.773,19.888 61.29,19.888 60.274,20.904 60.274,22.657 61.443,23.825 64.16,23.825
  Bottom Layer w0.5: v1(77.064,1.981) 77.724,2.642 J2.1
pads on no net: J2.2 U1.1 U1.2 U1.3 U1.4 U1.5 U1.6 U1.8 U1.11 U1.12 U1.13 U1.14 U1.15 U1.16 U1.21 U1.22 U1.23 U1.24 U1.27 U1.28 U1.29 U1.30 U1.33 U1.34 U1.35 U1.36 U1.37 U1.42 U1.43 U1.44 U1.45 U1.46 U1.47 U1.48 U1.49 U1.55 U1.58 U1.59 U1.60 U1.61 U1.62 U1.63 U1.64 U2.1 U2.4 U3.12 U4.1 U4.4 U5.1 U5.4 U6.2 U6.3 U6.5 U7.1 U7.4 U8.1 U8.4 U9.1 U9.4 U10.10 U10.12 U11.5 U12.1 U12.4 U14.2 U14.3 U14.9 U14.11

## Polygon pours and split planes (outlines as drawn)
INPUTGND on Bottom Layer "Bottom Layer-No Net" (solid, pour order 9): 1.3,1.3 1.3,35.662 9.5,35.662 9.677,35.662 9.77,35.692 9.779,35.662 9.779,26.543 10.033,26.543 14.605,21.971 14.732,22.098 30.353,22.098 31.877,22.098 35.687,18.288 35.56,18.161 35.56,1.3
CTRLGND on Bottom Layer "Bottom Layer-No Net" (solid, pour order 11): 36.703,1.3 36.703,25.908 38.989,25.908 45.212,32.131 45.72,32.639 65.405,32.639 65.405,32.893 69.723,37.084 69.85,37.084 87.249,37.084 87.376,37.084 95.631,28.829 95.758,28.702 95.758,14.605 97.282,14.605 99.06,12.827 144.272,12.827 144.272,14.859 150.114,20.701 197.7,20.701 197.7,1.3 36.83,1.3
MAINGND on Bottom Layer "Bottom Layer-No Net" (solid, pour order 14): 1.3,36.195 1.3,47.2 197.7,47.2 197.7,21.463 149.606,21.463 149.733,21.463 143.891,15.621 143.51,15.621 143.51,13.589 143.383,13.462 99.949,13.462 99.695,13.462 97.79,15.367 96.901,15.367 96.901,29.337 88.392,37.846 88.011,37.846 69.85,37.846 69.088,37.846 68.961,37.846 64.897,33.782 64.262,33.147 45.593,33.147 45.212,33.528 38.735,27.051 35.941,27.051 35.687,26.797 33.02,24.13 31.496,24.13 30.734,24.13 29.591,22.987 14.859,22.987 10.795,27.051 10.795,36.195 1.3,36.195
MAINPOWER+24 on Top Layer "Bottom Layer-No Net" (solid, pour order 13): 1.3,36.195 1.3,46.839 96.901,46.839 96.901,35.052 96.901,31.623 96.901,29.337 88.392,37.846 88.011,37.846 69.85,37.846 69.088,37.846 68.961,37.846 64.897,33.782 64.262,33.147 45.593,33.147 45.212,33.528 38.735,27.051 35.941,27.051 35.687,26.797 33.02,24.13 31.496,24.13 30.734,24.13 29.591,22.987 14.859,22.987 10.795,27.051 10.795,36.195
OUTVCC+5 on Top Layer "Bottom Layer-No Net" (solid, pour order 12): 97.79,47.2 197.7,47.2 197.7,21.463 149.606,21.463 149.733,21.463 143.891,15.621 143.51,15.621 143.51,13.589 143.383,13.462 99.949,13.462 99.695,13.462 97.79,15.367 97.79,15.494 97.79,29.464
INPUTVCC on Top Layer "Bottom Layer-No Net" (solid, pour order 8): 1.264,1.264 1.264,35.905 9.743,35.905 9.87,36.032 9.743,35.905 9.743,26.507 9.997,26.507 14.569,21.935 14.696,22.062 30.317,22.062 31.841,22.062 35.651,18.252 35.524,18.125 35.524,1.264 1.264,1.264
CTRLVCC+3.3 on Top Layer "Bottom Layer-No Net" (solid, pour order 10): 36.703,1.3 36.703,25.908 38.989,25.908 45.212,32.131 45.72,32.639 65.405,32.639 65.405,32.893 69.723,37.084 69.85,37.084 87.249,37.084 87.376,37.084 95.631,28.829 95.758,28.702 95.758,14.605 97.282,14.605 99.06,12.827 144.272,12.827 144.272,14.859 150.114,20.701 197.7,20.701 197.7,1.3 36.83,1.3

## Keep-outs
Keep-Out Layer:
  the board outline again, w0.3

## Other copper
Top Layer:
  text "Ahmad Rami For" at 103.708,8.712 h4
  text "Electrical Engineering" at 99.441,4.343 h4

## Silkscreen, mask and mechanical layers (free items; w line width, h text height)
Mechanical 3:
  the board outline again, w0.1

## Text inside footprints (layer, text, board x,y; h text height)
C5: Top Overlay "+" at 133.756,40.107 h1.5 r270